# Altium PCB PCB1.pcbdoc
Units mil, origin at the board's own origin, x right, y up, seen from the top; angles counter-clockwise.
Board outline 6560 x 4425 mil, 2 copper layers (Top Layer, Bottom Layer); 17 components, 16 nets, 60 pads, 75 vias.
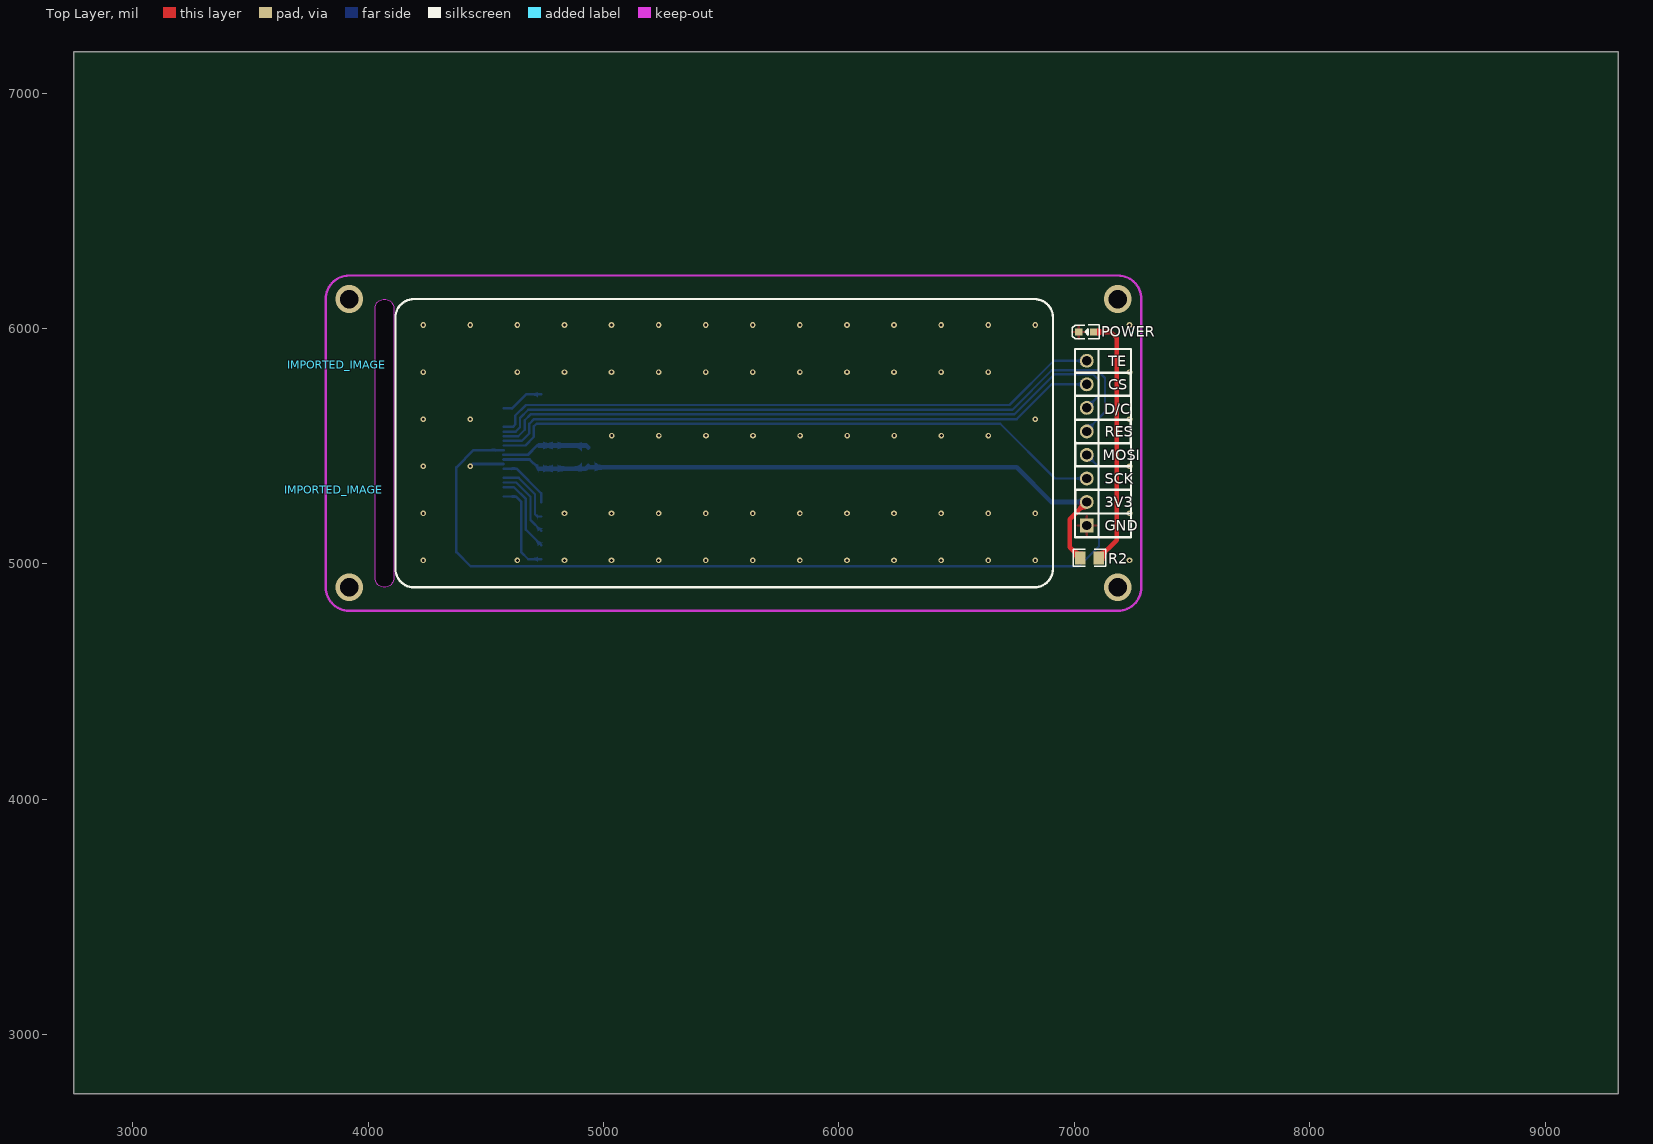
[diagram p0: Top Layer view]
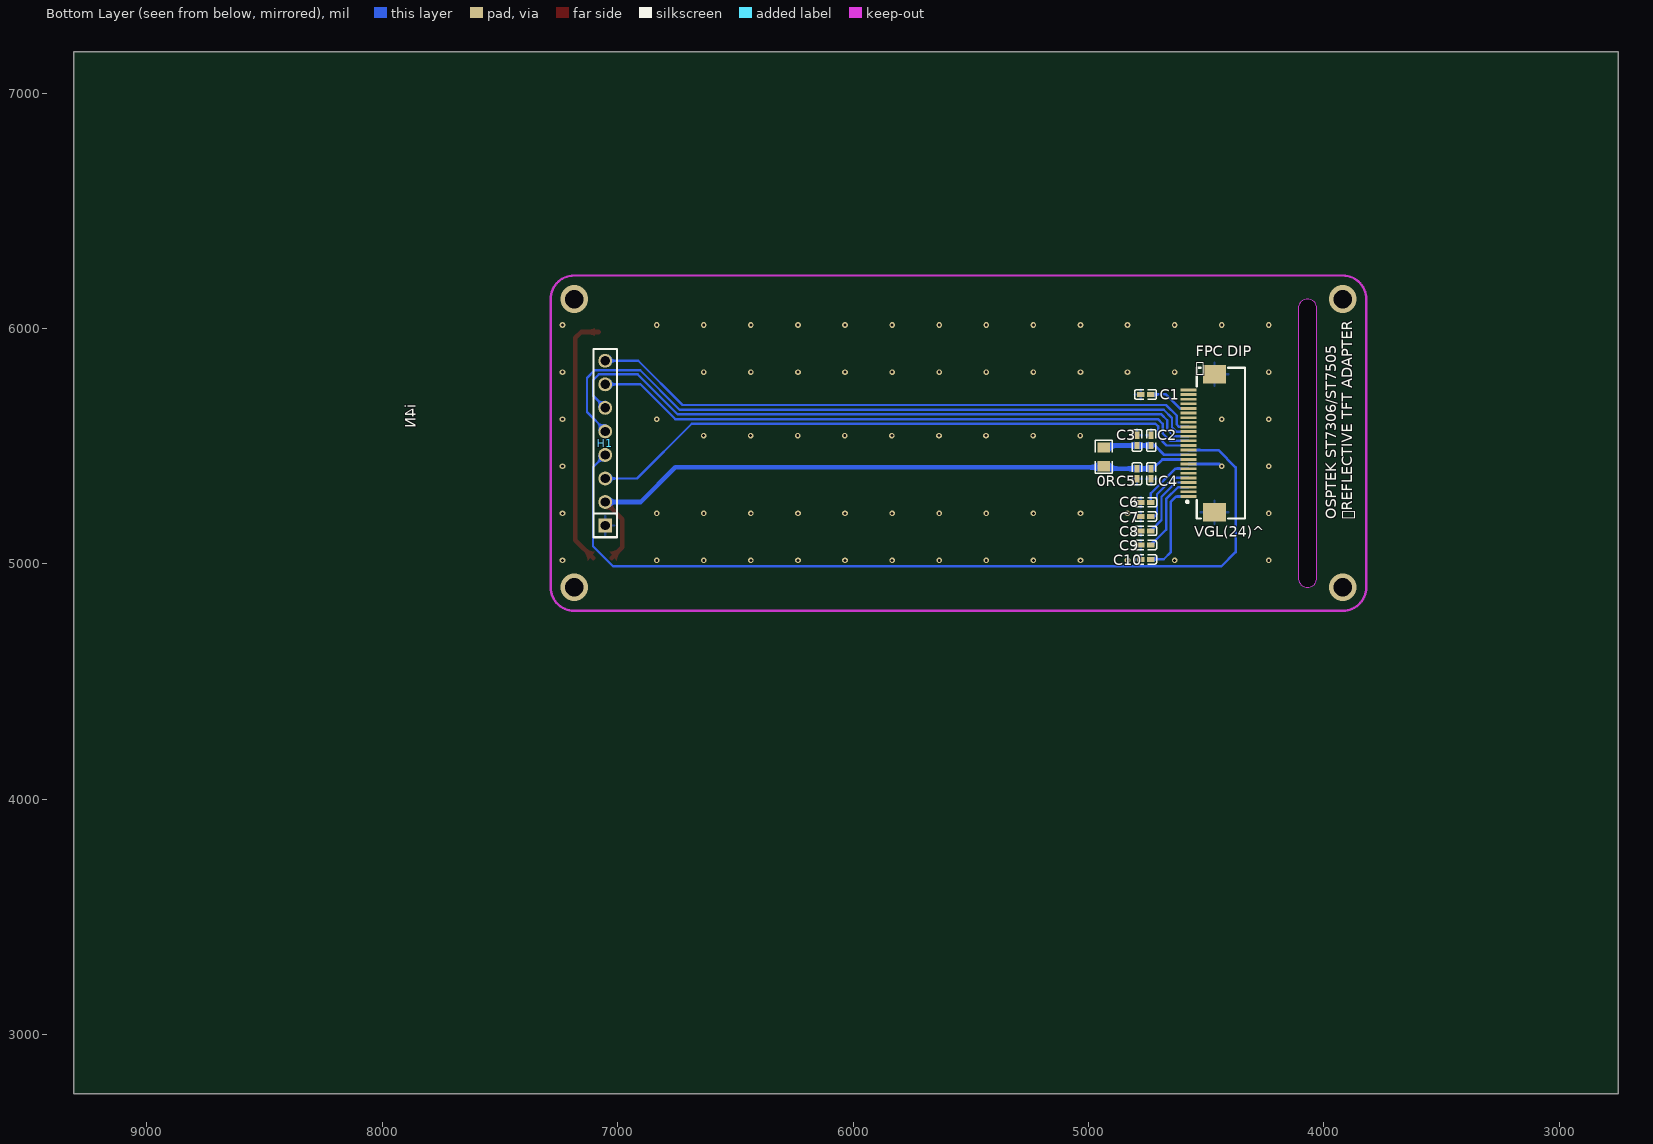
[diagram p1: Bottom Layer view, seen from below]

## Layer stack, top to bottom
Top Layer: signal copper (thickness not stored)
Dielectric: dielectric 12.6, FR-4, Dk 4.8
Bottom Layer: signal copper (thickness not stored)

## Board outline
9310,2750 2750,2750 2750,7175 9310,7175
cut-out: 4069.37,6125 cw(c4069.37,6085.63) 4108.74,6085.63 4108.74,4939.96 cw(c4069.37,4939.96) 4069.37,4900.59 cw(c4069.37,4939.96) 4030,4939.96 4030,6085.63 cw(c4069.37,6085.63)

## Design rules (kind name [scope] priority, off if disabled: settings)
Clearance copperThickness1oz [All] p1: gap=7 ignorepadtopadclearanceinfootprint=FALSE except(4: Track-Track; 6: Track-SMDPad SMDPad-SMDPad Track-THPad SMDPad-THPad THPad-THPad Track-Via SMDPad-Via THPad-Via Via-Via SMDPad-Fill THPad-Fill Via-Fill Fill-Fill Track-Region SMDPad-Region THPad-Region Via-Region Region-Region Track-Poly SMDPad-Poly THPad-Poly Via-Poly Fill-Poly Region-Poly Poly-Poly Track-Text SMDPad-Text THPad-Text Via-Text Fill-Text Region-Text Poly-Text Text-Text; 6.9: Track-Hole SMDPad-Hole THPad-Hole Via-Hole Fill-Hole Region-Hole Poly-Hole Text-Hole Sheet-Hole; 11.8: Track-Fill Fill-Region Track-Sheet SMDPad-Sheet THPad-Sheet Via-Sheet Fill-Sheet Region-Sheet Poly-Sheet Text-Sheet)
Clearance copperThickness2oz [All] p1: gap=7 ignorepadtopadclearanceinfootprint=FALSE except(6: Track-SMDPad SMDPad-SMDPad Track-THPad SMDPad-THPad THPad-THPad Track-Via SMDPad-Via THPad-Via Via-Via SMDPad-Fill THPad-Fill Via-Fill Fill-Fill Track-Region SMDPad-Region THPad-Region Via-Region Region-Region Track-Poly SMDPad-Poly THPad-Poly Via-Poly Fill-Poly Region-Poly Poly-Poly Track-Text SMDPad-Text THPad-Text Via-Text Fill-Text Region-Text Poly-Text Text-Text; 6.9: Track-Hole SMDPad-Hole THPad-Hole Via-Hole Fill-Hole Region-Hole Poly-Hole Text-Hole Sheet-Hole; 8: Track-Track; 11.8: Track-Fill Fill-Region Track-Sheet SMDPad-Sheet THPad-Sheet Via-Sheet Fill-Sheet Region-Sheet Poly-Sheet Text-Sheet)
DiffPairsRouting differentialPair [All] p1: maxuncoupledlength=10 maxlimit=6 mostfreqgap=6 toplayer_minwidth=5 toplayer_prefwidth=10 toplayer_maxwidth=100 bottomlayer_minwidth=5 bottomlayer_prefwidth=10 bottomlayer_maxwidth=100
PasteMaskExpansion pasteMaskExpansion [All] p1:
PlaneConnect innerPlane [All] p1: planeconnectstyle=Relief reliefexpansion=20 reliefentries=4 reliefconductorwidth=10 reliefairgap=10
PolygonConnect copperRegion [All] p1: connectstyle=Relief reliefentries=4 reliefconductorwidth=10 polygonreliefangle="90 Angle" airgapwidth=10
RoutingVias viaSize [All] p1: viastyle="Through Hole" holewidth=12.0078 minholewidth=11.811 maxholewidth=248.0314 width=24.0158 minwidth=19.685 maxwidth=393.7008
SolderMaskExpansion solderMaskExpansion [All] p1: useseparateexpansions=TRUE expansion=2 expansionbottom=2
Width copperThickness1oz [All] p1: maxlimit=100 minlimit=5 preferedwidth=10
Width copperThickness2oz [All] p1: maxlimit=100 minlimit=8 preferedwidth=10

## Components (designator, comment, footprint, x,y, rotation, side; value= is the part's Value field where it differs from the comment)
0R "0805W8F0000T5E" R0805 4935,5455 r270 bottom
C1 "CL05A105KA5NQNC" C0402 4757.01,5719.49 r0 bottom
C2 "CL05B104KB54PNC" C0402 4733.39,5524.41 r270 bottom
C3 "CL05A105KA5NQNC" C0402 4794.02,5524.41 r270 bottom
C4 "CL05B104KB54PNC" C0402 4733.39,5383.07 r90 bottom
C5 "CL05A105KA5NQNC" C0402 4794.02,5383.07 r90 bottom
C6 "CL05A105KA5NQNC" C0402 4757.01,5261.61 r180 bottom
C7 "CL05A105KA5NQNC" C0402 4757.01,5200.98 r180 bottom
C8 "CL05A105KA5NQNC" C0402 4757.01,5140.35 r180 bottom
C9 "CL05A105KA5NQNC" C0402 4757.01,5079.72 r180 bottom
C10 "CL05A105KP5NNNC" C0402 4757.01,5019.09 r180 bottom
"FPC DIP /  " "FPC-05F-24PH20" FPC-SMD_24P-P0.50_FPC-05F-24PH20 4515,5512.8 r90 bottom (schematic designator "FPC DIP")
H1 "B-2100S08P-A110" HDR-TH_8P-P2.54-V-M 7052.87,5512.8 r90 bottom
IMPORTED_IMAGE "IMPORTED_IMAGE" IMPORTED_IMAGE 3865.97,5845 r0 top
IMPORTED_IMAGE "IMPORTED_IMAGE" IMPORTED_IMAGE 3855,5315 r0 top
POWER "LTST-C191KSKT" LED0603-RD-YELLOW 7050,5985 r0 top
R2 "FRR0805J102 TS" R0805 7065,5025 r180 top

## Footprints (in the part's own frame and the unit in brackets; to place one, negate y for a bottom-side part, rotate by r counter-clockwise, add the part's x,y. Pads: shape width x height; smd on the part's side, far side on the other; paste and mask are expansions set on the pad)
C0402 [mm]
  rect 0.79x0.54 smd: 1(-0.545,0) 2(0.545,0)
  silkscreen extent -1.17,-0.5 1.17,0.5
FPC-SMD_24P-P0.50_FPC-05F-24PH20 [mm]
  rect 0.3x1.75 smd: 1(-5.753,1.537) 2(-5.25,1.537) 3(-4.75,1.537) 4(-4.25,1.537) 5(-3.75,1.537) 6(-3.25,1.537) 7(-2.75,1.537) 8(-2.25,1.537) 9(-1.75,1.537) 10(-1.25,1.537) 11(-0.75,1.537) 12(-0.25,1.537) 13(0.25,1.537) 14(0.75,1.537) 15(1.245,1.537) 16(1.753,1.537) 17(2.25,1.537) 18(2.75,1.537) 19(3.25,1.537) 20(3.75,1.537) 21(4.25,1.537) 22(4.75,1.537) 23(5.25,1.537) 24(5.75,1.537)
  rect 2x2.5 smd: 25(7.44,-1.288) 26(-7.44,-1.288)
  silkscreen extent -8.13,-4.57 8.13,1.78
HDR-TH_8P-P2.54-V-M [mm]
  rect 1.5x1.5 hole 1: 1(-8.89,0)
  round 1.5 hole 1: 2(-6.35,0) 3(-3.81,0) 4(-1.27,0) 5(1.27,0) 6(3.81,0) 7(6.35,0) 8(8.89,0)
  silkscreen extent -10.16,-1.27 10.16,1.27
IMPORTED_IMAGE [mil]
LED0603-RD-YELLOW [mm]
  rect 0.8x0.8 smd: 1(-0.799,-0.003) 2(0.799,0.003)
  silkscreen extent -1.49,-0.75 1.39,0.76
R0805 [mm]
  rect 1.133x1.377 smd: 1(-1,0) 2(1,0)
  silkscreen extent -1.76,-0.92 1.76,0.92

## Via types
v1: diameter 24.02, hole 12.01, Top Layer to Bottom Layer, 71 vias
v2: diameter 118.11, hole 78.74, Top Layer to Bottom Layer, 4 vias

## Nets (pads, with @x,y where several pads share a name; then routed paths per layer and width w, separated by ;. In a path a pad name is that pad's centre, name@x,y a point inside that pad or via, vN(x,y) a via of type N, cw(c..) or ccw(c..) an arc to the next point about the centre after c; other vN are vias at no path point)
$1N4245: POWER.2 R2.1 | length 1075.3
  Top Layer w19.68: POWER.2 7081.61,5985 7155,5985 7180,5960 7180,5100.63 R2.1
AVDD: "FPC DIP /  .4" C8.2 | length 303
  Bottom Layer w10: 4575.51,5345.47 4629.53,5345.47 4690,5285 4690,5185.9 C8.2
GND: 
IOVCC: 0R.1 "FPC DIP /  .10" C2.2 C3.2 | length 379.3
  Bottom Layer w11.81: 4575.51,5463.58 4678.58,5463.58 4717.95,5502.95 C2.2@4725.51,5502.95
  Bottom Layer w19.68: C2.2@4725.52,5502.95 C3.2 4926.42,5502.95 0R.1
LCD_CS: "FPC DIP /  .13" H1.7 | length 2600.3
  Bottom Layer w10: 4575.51,5522.63 4652.63,5522.63 4685,5555 4685,5595 4705,5615 6755,5615 6902.8,5762.8 H1.7
LCD_D/C: "FPC DIP /  .14" H1.6 | length 2810.9
  Bottom Layer w10: 4575.51,5542.32 4637.32,5542.32 4665,5570 4665,5610 4690,5635 6745,5635 6915,5805 7080,5805 7105,5780 7105,5714.92 H1.6
LCD_RES: "FPC DIP /  .15" H1.5 | length 2958.3
  Bottom Layer w10: 4575.51,5561.8 4626.8,5561.8 4645,5580 4645,5620 4680,5655 6737.09,5655 6904.37,5822.28 7097.72,5822.28 7130,5790 7130,5644.92 7052.87,5567.8 H1.5
LCD_SCLK: "FPC DIP /  .12" H1.3 | length 2638
  Bottom Layer w10: 4575.51,5502.95 4667.95,5502.95 4703.9,5538.9 4703.9,5583.9 4715,5595 6685,5595 6917.2,5362.8 H1.3
LCD_SDI: "FPC DIP /  .11" H1.4 | length 3790.3
  Bottom Layer w10: 4575.51,5483.26 4448.26,5483.26 4375,5410 4375,5050 4435,4990 7020,4990 7105,5075 7105,5410.67 H1.4
TE: "FPC DIP /  .16" H1.8 | length 2616.1
  Bottom Layer w10: 4575.51,5581.8 4615,5581.8 4625,5591.8 4625,5630 4670,5675 6725,5675 6912.8,5862.8 H1.8
VCC: 0R.2 "FPC DIP /  .9" C4.2 C5.2 H1.2 R2.2 | length 2848.4
  Top Layer w19.68: R2.2 6980,5070.63 6980,5190 H1.2@7052.8,5262.8
  Bottom Layer w11.81: 4575.51,5443.89 4686.11,5443.89 C4.2@4725.47,5404.53
  Bottom Layer w19.68: C4.2@4725.51,5404.53 4923.9,5404.53 0R.2 4940.63,5410 6755,5410 6902.2,5262.8 H1.2
VCCIO: "FPC DIP /  .20" C1.1 | length 184.9
  Bottom Layer w10: 4575.51,5660.43 4611.71,5660.43 4671.28,5720 4735.04,5720 C1.1
VGH: "FPC DIP /  .7" C6.2 | length 241.4
  Bottom Layer w10: 4575.51,5404.52 4630.48,5404.52 4735.55,5299.45 C6.2
VGL: "FPC DIP /  .1" C10.2 | length 396.7
  Bottom Layer w10: 4575.5,5286.3 4628.7,5286.3 4650,5265 4650,5050 4680,5020 4734.64,5020 C10.2
VIV: "FPC DIP /  .5" C7.2 | length 277.8
  Bottom Layer w10: 4575.51,5365.15 4639.85,5365.15 4709.01,5295.99 4709.01,5210.98 4719.01,5200.98 C7.2
VNV: "FPC DIP /  .3" C9.2 | length 337.9
  Bottom Layer w10: 4575.51,5325.78 4619.22,5325.78 4670,5275 4670,5145.27 C9.2
pads on no net: "FPC DIP /  .2" "FPC DIP /  .6" "FPC DIP /  .8" "FPC DIP /  .17" "FPC DIP /  .18" "FPC DIP /  .19" "FPC DIP /  .21" "FPC DIP /  .22" "FPC DIP /  .23" "FPC DIP /  .24" "FPC DIP /  .25" "FPC DIP /  .26" C1.2 C2.1 C3.1 C4.1 C5.1 C6.1 C7.1 C8.1 C9.1 C10.1 H1.1 POWER.1
copper on no net: | length 145.4
  Bottom Layer w11.81: v1(4434.1,5414.69) 4443.62,5424.21 4575.51,5424.21
  other v1: 4234.1,5014.69 4634.1,5014.69 4834.1,5014.69 5034.1,5014.69 5234.1,5014.69 5434.1,5014.69 5634.1,5014.69 5834.1,5014.69 6034.1,5014.69 6234.1,5014.69 6434.1,5014.69 6634.1,5014.69 6834.1,5014.69 7234.1,5014.69 4234.1,5214.69 4834.1,5214.69 5034.1,5214.69 5234.1,5214.69 5434.1,5214.69 5634.1,5214.69 5834.1,5214.69 6034.1,5214.69 6234.1,5214.69 6434.1,5214.69 6634.1,5214.69 6834.1,5214.69 7234.1,5214.69 4234.1,5414.69 7234.1,5414.69 5035,5545 5235,5545 5435,5545 5635,5545 5835,5545 6035,5545 6235,5545 6435,5545 6635,5545 4234.1,5614.69 4434.1,5614.69 6834.1,5614.69 7234.1,5614.69 4234.1,5814.69 4634.1,5814.69 4834.1,5814.69 5034.1,5814.69 5234.1,5814.69 5434.1,5814.69 5634.1,5814.69 5834.1,5814.69 6034.1,5814.69 6234.1,5814.69 6434.1,5814.69 6634.1,5814.69 7234.1,5814.69 4234.1,6014.69 4434.1,6014.69 4634.1,6014.69 4834.1,6014.69 5034.1,6014.69 5234.1,6014.69 5434.1,6014.69 5634.1,6014.69 5834.1,6014.69 6034.1,6014.69 6234.1,6014.69 6434.1,6014.69 6634.1,6014.69 6834.1,6014.69 7234.1,6014.69
  other v2: 3920,4900.59 7184.57,4900.59 3920,6125 7184.57,6125

## Polygon pours and split planes (outlines as drawn)
no net on Top Layer (solid, remove dead copper): 3335,4510 7560,4510 7560,6925 3335,6925
no net on Top Layer (solid, remove dead copper, pour order 2): 3000,4040 8205,4040 8205,6530 3000,6530
no net on Bottom Layer (solid, remove dead copper, pour order 4): 3500,4195 7780,4195 7780,6345 3500,6345

## Keep-outs
Board Outline Layer:
  lines w10: 3820,4900.59 ccw(c3920,4900.59) 3920,4800.59 7184.57,4800.59 ccw(c7184.57,4900.59) 7284.57,4900.59 7284.57,6125 ccw(c7184.57,6125) 7184.57,6225 3920,6225 ccw(c3920,6125) 3820,6125 3820,4900.59
Multi-Layer:
  region: 4069.37,6125 cw(c4069.37,6085.63) 4108.74,6085.63 4108.74,4939.96 cw(c4069.37,4939.96) 4069.37,4900.59 cw(c4069.37,4939.96) 4030,4939.96 4030,6085.63 cw(c4069.37,6085.63)

## Other copper
Top Layer:
  region net VCC: 7031.23,5227.31 7017.37,5241.29 7019.46,5243.77 7020.96,5246.36 7021.97,5249.06 7022.61,5251.89 7022.96,5254.85 7023.14,5257.93 7023.4,5264.49 7054.46,5233.31 7047.9,5233.07 7044.81,5232.9 7041.85,5232.54 7039.01,5231.91 7036.3,5230.9 7033.71,5229.4
  region net $1N4245: 7126.75,5994.84 7126.75,5975.16 ccw(c7126.75,5896.73) 7097.22,5969.39 7097.22,6000.88 ccw(c7126.75,6070.03)
  region net VCC: 6992.9,5043.81 7002,5062.55 ccw(c7033.32,5104.3) 7033.32,5052.11 7003.34,5012.5 ccw(c6951.14,5012.5)
  region net $1N4245: 7128,5062.55 7137.1,5043.81 ccw(c7178.86,5012.5) 7126.66,5012.5 7096.68,5052.11 ccw(c7096.68,5104.3)
Bottom Layer:
  region net VCC: 7012.52,5252.95 7012.52,5272.64 7015.75,5272.91 7018.64,5273.68 7021.28,5274.88 7023.73,5276.44 7026.07,5278.28 7028.37,5280.34 7033.19,5284.8 7033.19,5240.79 7028.37,5245.25 7026.07,5247.31 7023.73,5249.15 7021.28,5250.71 7018.64,5251.91 7015.75,5252.68
  region net LCD_SCLK: 7012.52,5357.8 7012.52,5367.8 7014.75,5367.89 7016.68,5368.18 7018.35,5368.64 7019.79,5369.26 7021.05,5370.03 7022.16,5370.93 7024.07,5373.11 7027.74,5378.56 7030.09,5381.63 7031.53,5383.21 7033.19,5384.8 7033.19,5340.79 7031.53,5342.38 7030.09,5343.96 7027.74,5347.03 7024.07,5352.48 7022.16,5354.66 7021.05,5355.56 7019.79,5356.33 7018.35,5356.95 7016.68,5357.41 7014.75,5357.7
  region net LCD_SDI: 7084.94,5437.8 7077.87,5430.73 7076.23,5432.23 7074.66,5433.4 7073.16,5434.25 7071.7,5434.84 7070.26,5435.18 7068.84,5435.32 7065.95,5435.14 7059.5,5433.88 7055.66,5433.37 7053.53,5433.27 7051.23,5433.31 7082.36,5464.44 7082.4,5462.14 7082.3,5460.01 7081.79,5456.17 7080.53,5449.72 7080.35,5446.83 7080.49,5445.41 7080.83,5443.97 7081.42,5442.51 7082.27,5441.01 7083.44,5439.44
  region net LCD_RES: 7073.41,5595.4 7084.21,5592.06 7082.78,5590.48 7081.66,5588.94 7080.82,5587.41 7080.23,5585.89 7079.86,5584.36 7079.68,5582.83 7079.8,5579.68 7080.35,5576.38 7081.11,5572.83 7081.85,5568.96 7082.34,5564.69 7047.71,5591.87 7050.55,5592.16 7053.89,5592.24 7061.27,5592.27 7064.93,5592.47 7068.3,5592.98 7069.82,5593.38 7071.19,5593.91 7072.4,5594.58
  region net LCD_D/C: 7077.87,5694.87 7084.94,5687.79 7083.44,5686.15 7082.27,5684.58 7081.42,5683.08 7080.83,5681.62 7080.49,5680.18 7080.35,5678.76 7080.53,5675.87 7081.79,5669.42 7082.3,5665.58 7082.4,5663.45 7082.36,5661.15 7051.23,5692.28 7053.53,5692.32 7055.66,5692.22 7059.5,5691.71 7065.95,5690.45 7068.84,5690.27 7070.26,5690.41 7071.7,5690.76 7073.16,5691.34 7074.66,5692.19 7076.23,5693.36
  region net LCD_CS: 7012.52,5757.8 7012.52,5767.8 7014.75,5767.89 7016.68,5768.18 7018.35,5768.64 7019.79,5769.26 7021.05,5770.03 7022.16,5770.93 7024.07,5773.11 7027.74,5778.56 7030.09,5781.63 7031.53,5783.21 7033.19,5784.8 7033.19,5740.79 7031.53,5742.38 7030.09,5743.96 7027.74,5747.03 7024.07,5752.48 7022.16,5754.66 7021.05,5755.56 7019.79,5756.33 7018.35,5756.95 7016.68,5757.41 7014.75,5757.7
  region net TE: 7012.52,5857.8 7012.52,5867.8 7014.75,5867.89 7016.68,5868.18 7018.35,5868.64 7019.79,5869.26 7021.05,5870.03 7022.16,5870.93 7024.07,5873.11 7027.74,5878.56 7030.09,5881.63 7031.53,5883.21 7033.19,5884.8 7033.19,5840.79 7031.53,5842.38 7030.09,5843.96 7027.74,5847.03 7024.07,5852.48 7022.16,5854.66 7021.05,5855.56 7019.79,5856.33 7018.35,5856.95 7016.68,5857.41 7014.75,5857.7
  region net VCC: 4878.37,5394.69 4878.37,5414.37 ccw(c4878.37,5451.28) 4907.89,5429.13 4907.89,5393.34 ccw(c4878.37,5070.88)
  region net VCC: 4991.63,5419.84 4991.63,5400.16 ccw(c4991.63,5332.84) 4962.11,5393.34 4962.11,5434.61 ccw(c4991.63,5456.75)
  region net IOVCC: 4878.37,5493.11 4878.37,5512.79 ccw(c4878.37,5627.31) 4907.89,5516.66 4907.89,5478.34 ccw(c4878.37,5456.2)
  region net VCCIO: 4705,5715 4705,5725 ccw(c4705,5749.54) 4720,5730.12 4720,5708.86 ccw(c4705,5693.61)
  region net IOVCC: 4773.54,5512.79 4773.54,5493.11 ccw(c4773.54,5413.87) 4744.02,5487.4 4744.02,5518.51 ccw(c4773.54,5591.94)
  region net VCC: 4753.86,5394.69 4753.86,5414.37 ccw(c4753.86,5493.56) 4783.39,5420.08 4783.39,5388.97 ccw(c4753.86,5315.49)
  region net VCC: 4834.17,5414.37 4834.17,5394.69 ccw(c4834.17,5315.49) 4804.65,5388.97 4804.65,5420.08 ccw(c4834.17,5493.56)
  region net VIV: 4719.01,5195.98 4719.01,5205.98 ccw(c4703.4,5211.61) 4719.99,5211.61 4719.99,5190.35 ccw(c4703.4,5190.35)
  region net AVDD: 4714.69,5154.14 4726.69,5156.29 ccw(c4742.6,5177.5) 4742.6,5150.98 4719.99,5138.23 ccw(c4693.48,5138.23)
  region net VNV: 4714.69,5093.51 4726.69,5095.66 ccw(c4742.6,5116.87) 4742.6,5090.35 4719.99,5077.6 ccw(c4693.48,5077.6)
  region net VGL: 4704.99,5015 4704.99,5025 ccw(c4704.99,5051.17) 4719.99,5029.72 4719.99,5008.46 ccw(c4704.99,4994.52)
  region net VGL: 4624.95,5291.3 4624.95,5281.3 ccw(c4624.95,5156.6) 4609.95,5280.39 4609.95,5292.2 ccw(c4624.95,5415.99)
  region net VGH: 4624.96,5409.52 4624.96,5399.52 ccw(c4624.96,5274.83) 4609.96,5398.61 4609.96,5410.43 ccw(c4624.96,5534.21)
  region net LCD_SDI: 4526.06,5478.26 4526.06,5488.26 ccw(c4526.06,5612.95) 4541.06,5489.17 4541.06,5477.35 ccw(c4526.06,5353.57)
  region net VCCIO: 4611.71,5665.43 4611.71,5655.43 ccw(c4611.71,5653.29) 4609.96,5654.52 4609.96,5666.34 ccw(c4611.71,5667.57)
  region net IOVCC: 4753.86,5493.11 4753.86,5512.79 ccw(c4753.86,5591.99) 4783.39,5518.5 4783.39,5487.4 ccw(c4753.86,5413.91)
  region net IOVCC: 4834.17,5512.79 4834.17,5493.11 ccw(c4834.17,5413.91) 4804.65,5487.4 4804.65,5518.5 ccw(c4834.17,5591.99)
  region net VCC: 4715.19,5406.46 4707.99,5430.37 ccw(c4744.1,5466.48) 4722.76,5420.08 4722.76,5388.97 ccw(c4696.88,5388.16)
  region net VCC: 4773.54,5414.37 4773.54,5394.69 ccw(c4773.54,5315.49) 4744.02,5388.97 4744.02,5420.08 ccw(c4773.54,5493.56)

## Silkscreen, mask and mechanical layers (free items; w line width, h text height)
Top Silkscreen Layer:
  lines w10: 7002.87,5811.54 7236.54,5811.54 7240,5815 7240,5714.51 7002.87,5714.51 7002.87,5612.99 7237.99,5612.99 7240,5615 7240,5512.8 7007.2,5512.8 7005,5515 7005,5414.84 7240.67,5414.84 7240.67,5314.87 7003.66,5314.87 7003.66,5213.72 7240.93,5213.72 ; 7002.87,5912.79 7002.87,5112.8 7102.87,5112.8 ; 7003.66,5912.79 7102.87,5912.79 ; 7102.87,5112.8 7102.87,5912.79 ; 7102.87,5112.8 7240.67,5112.8 7240.67,5912.79 7102.87,5912.79 ; 4115.98,4979.33 ccw(c4194.72,4979.33) 4194.72,4900.59 6830.55,4900.59 ccw(c6830.55,4979.33) 6909.29,4979.33 6909.29,6046.26 ccw(c6830.55,6046.26) 6830.55,6125 4194.72,6125 ccw(c4194.72,6046.26) 4115.98,6046.26 4115.98,4979.33
  text "TE" at 7145,5840 h45
  text "CS" at 7145,5740 h45
  text "D/C" at 7127.56,5636.13 h45
  text "RES" at 7130,5540 h45
  text "MOSI" at 7120,5440 h45
  text "SCK" at 7130,5340 h45
  text "3V3" at 7130,5240 h45
  text "GND" at 7130,5140 h45
Bottom Silkscreen Layer:
  text "i4N" at 7856.65,5677.63 h45 r270
  text "OSPTEK ST7306/ST7505  /  REFLECTIVE TFT ADAPTER" at 3880,5190 h45 r270
  text "VGL(24)^" at 4550,5115 h45
Mechanical Layer:
  lines w1: 4069.37,4900.59 ccw(c4069.37,4939.96) 4108.74,4939.96 4108.74,6085.63 ccw(c4069.37,6085.63) 4069.37,6125 ; 4069.37,4900.59 4069.37,4900.59 ; 4069.37,4900.59 cw(c4069.37,4939.96) 4030,4939.96 4030,6085.63 cw(c4069.37,6085.63) 4069.37,6125 ; 4069.37,6125 4069.37,6125
Mech6:
  text "PCB Width = FR-4 width + EVA form width /  = 2.6mm" at 3810,4485 h100
  text "Length of FPC inserted in the dip /  = 3.5mm" at 3810,4235 h100
  text "MAX Avaliable FPC length /  = 14.3 - (3.14*2.6*0.5) - 3.5 /  = 6.718mm" at 3810,3880 h100
  text "MIN Avaliable FPC length is when the  /  radius  = 2mm, as it's the length of the /  open area. /   /  Result: 4.52mm" at 3810,3290 h100
  text "(MAX+MIN)/2 = 5.619mm /  Take this as the FPC length for application" at 3810,3000 h100